# EAGLE board payload-board (EAGLE 9.6.2)
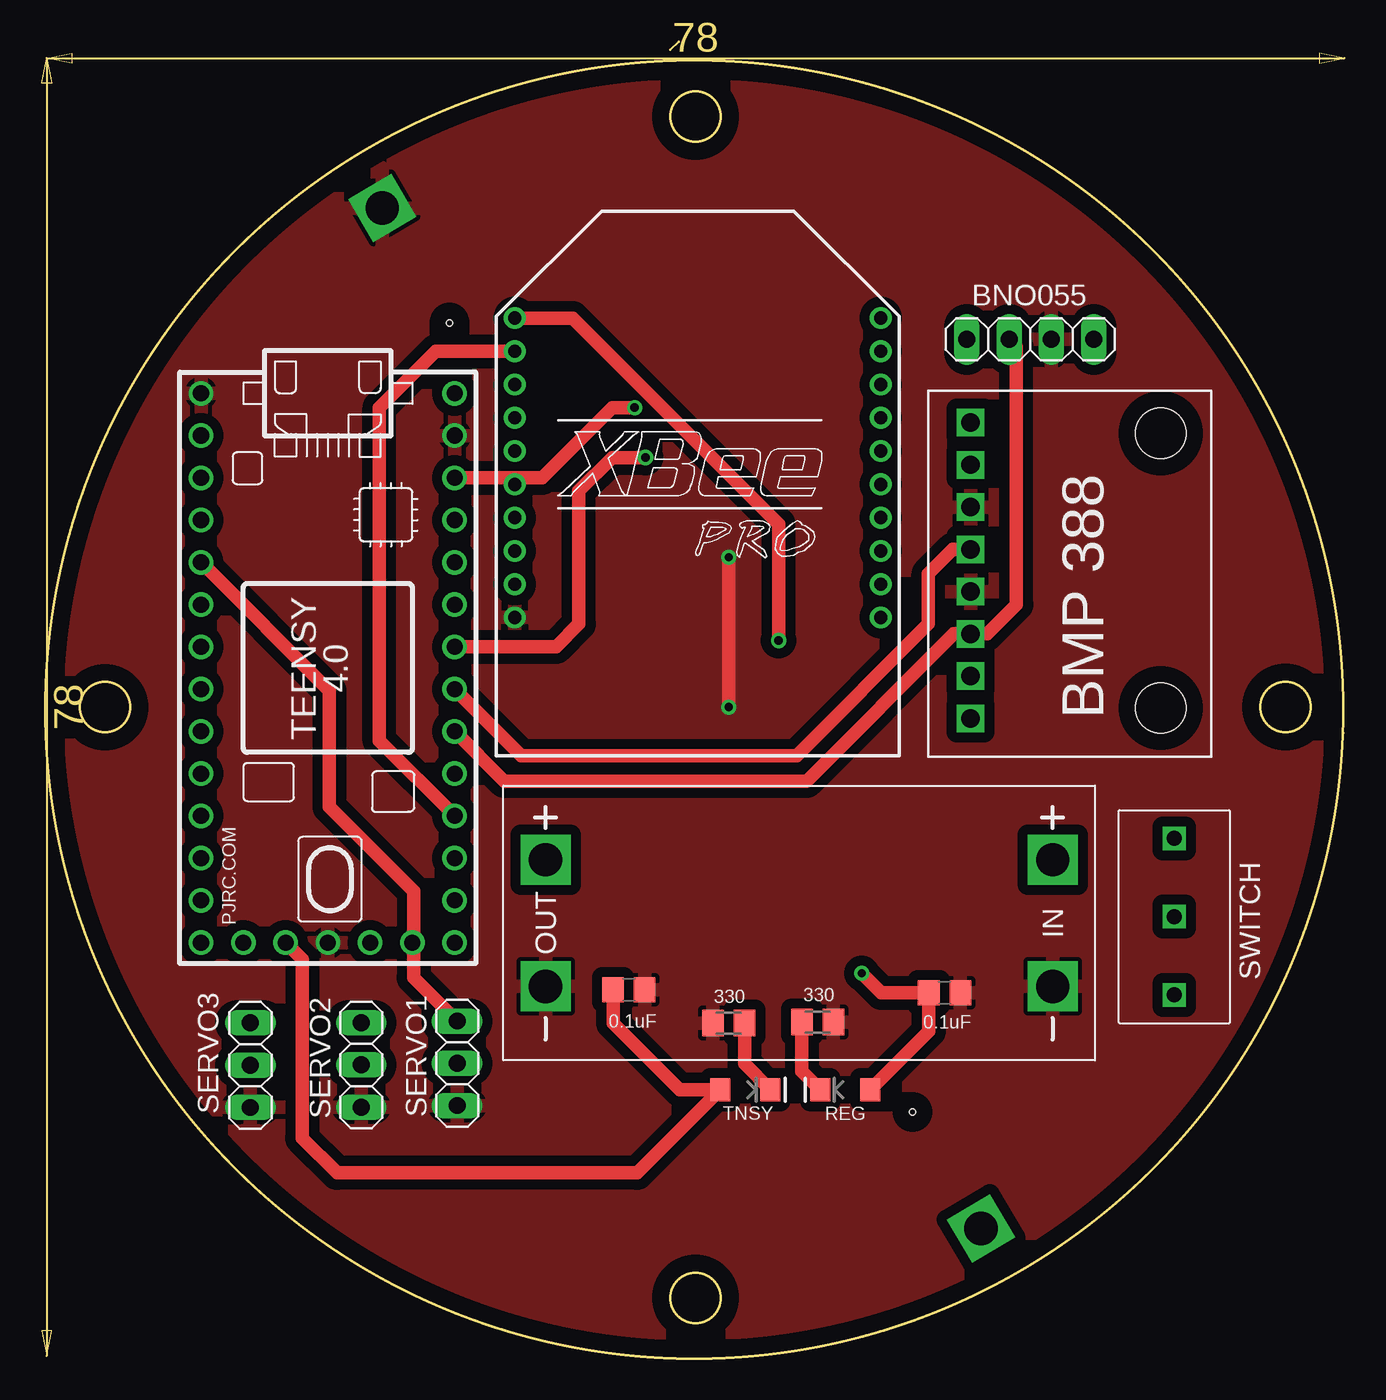
[diagram p0: board, top side]
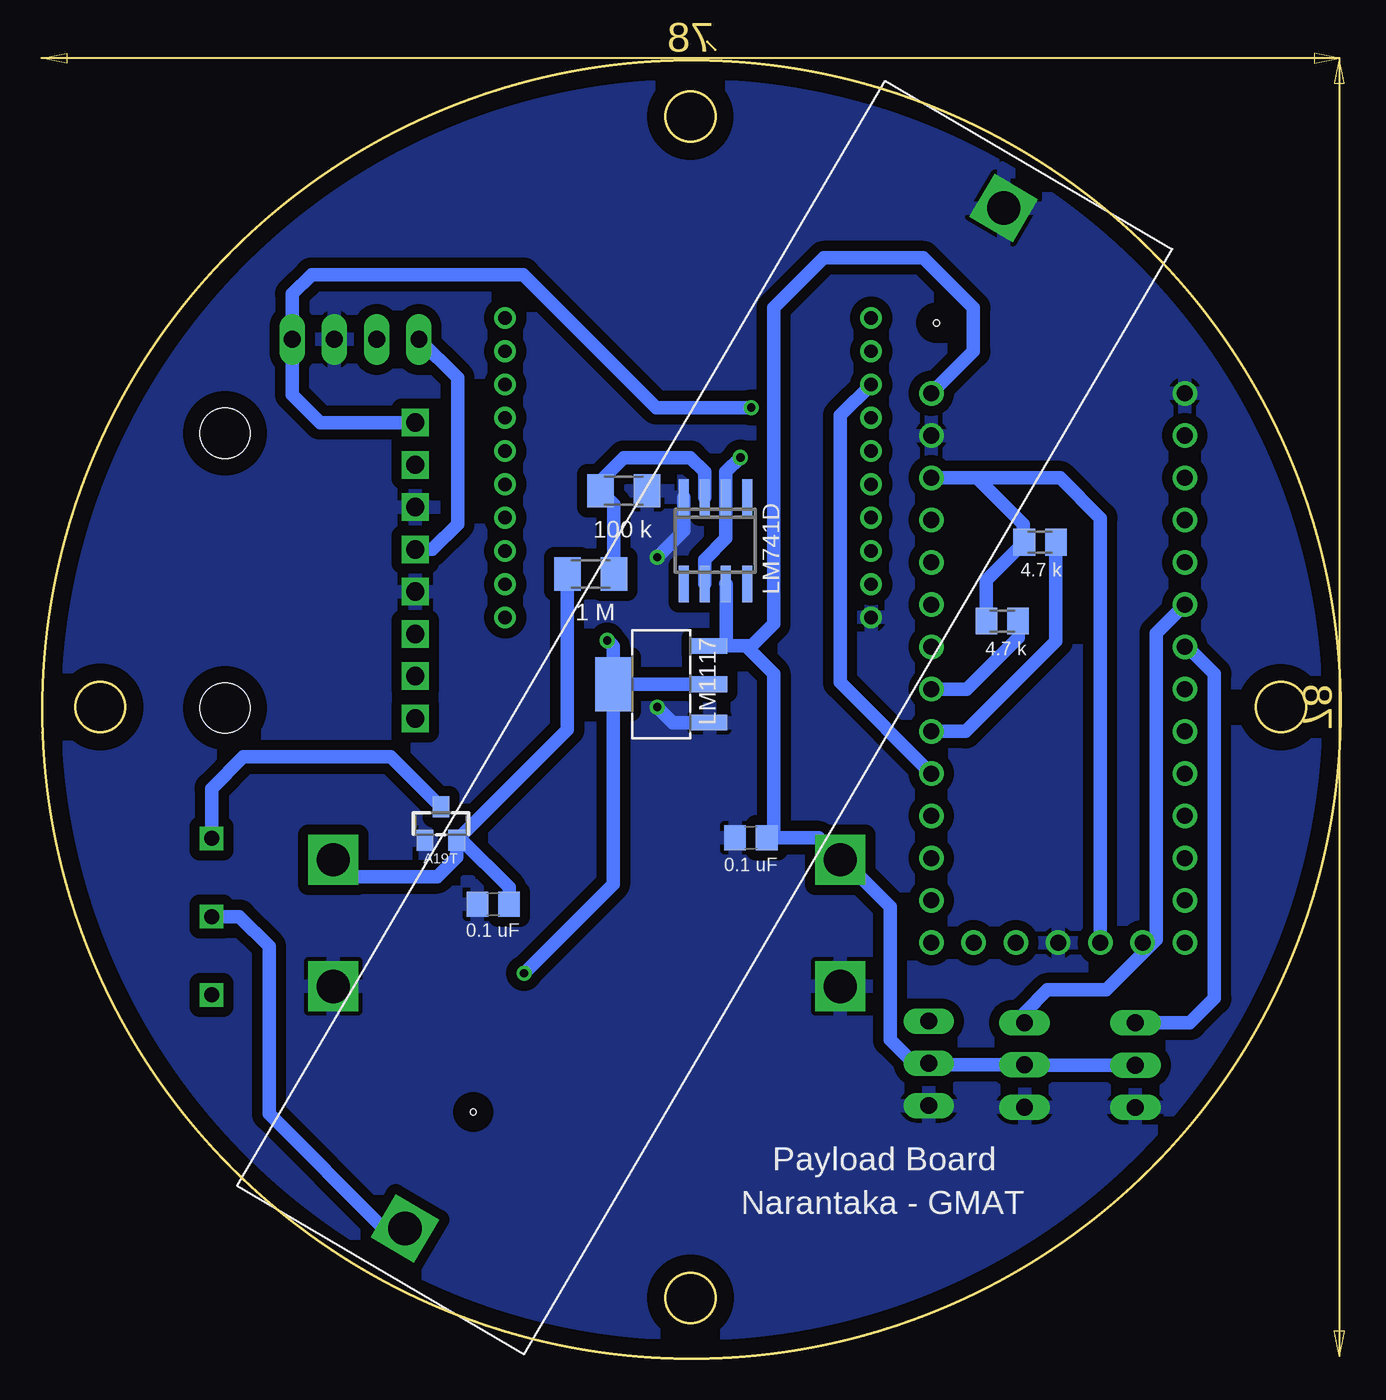
[diagram p1: board, bottom side, seen from below]

Size 78.02 x 79.15 mm. Coordinates in mm from the lower left corner, seen from the top.
Outline: 78,37.57 78.02,37.6
Outline: 37.57,78.65 38.07,79.15
Outline: circle at 39,39 radius 39
Outline: circle at 39.07,74.64 radius 1.5
Outline: circle at 39.07,3.64 radius 1.5
Outline: circle at 74.54,39.15 radius 1.5
Outline: circle at 3.58,39.14 radius 1.5
Copper layers (1*16): Top 0.035mm / dielectric 1.5mm / Bottom 0.035mm
Design rules "default *": minimum track width 6mil, minimum drill 0.35mm, track to track 6mil, track to pad 0.3mm, pad to pad 0.5mm, via to via 0.3mm, smd to smd 8mil, copper to edge 40mil, drill to drill 6mil, minimum pad ring 10mil, minimum via ring 8mil, stop-mask expansion 4mil, vias tented up to drill 0mil, thermal gap 10mil

## Footprints (pad centres in the part's own frame; a part is rotated, then mirrored left to right if it is on the bottom)
1X04 = drill 1.016 long: 1 -3.81,0; 2 -1.27,0; 3 1.27,0; 4 3.81,0
C0805 = smd 1.3 x 1.5: 1 -0.95,0; 2 0.95,0
SOT223 = smd 0.95 x 2.15: 1 -2.3,-2.9; 2 0,-2.9; 3 2.3,-2.9 | smd 3.25 x 2.15: 4 0,2.9
SO08 = smd 0.6 x 2.2: 1 -1.905,-2.6; 2 -0.635,-2.6; 3 0.635,-2.6; 4 1.905,-2.6; 5 1.905,2.6; 6 0.635,2.6; 7 -0.635,2.6; 8 -1.905,2.6
SOT23-WIDE = smd 1 x 1.27: 1 -0.95,-1; 2 0.95,-1; 3 0,1
LED-1206 = smd 1.2 x 1.4: A -1.5,0; C 1.5,0
M0805 = smd 1.3 x 1.6: 1 -0.95,0; 2 0.95,0
M1206 = smd 1.6 x 2: 1 -1.4,0; 2 1.4,0
1X03 = drill 1.016 long: 1 -2.54,0; 2 0,0; 3 2.54,0
SS12D0X = drill 0.9 square: 1 -4.7,0; 2 0,0; 3 4.7,0
DC-DC-STEP-UP-MT3608 = drill 2 pad 2.8 square: IN+ 15.24,3.81; IN- 15.24,-3.81; OUT+ -15.24,3.81; OUT- -15.24,-3.81
BMP388 = drill 1.1 square: 3VO 4.44,2.54; CS 17.14,2.54; GND 6.98,2.54; INT 19.68,2.54; SCK 9.52,2.54; SDI 14.6,2.54; SDO 12.06,2.54; VIN 1.9,2.54 | hole 3: 2.54,13.97; 19.05,13.97
18650 = drill 2 square: NEG 0,0; POS 0,71.12 | hole 0.35: 0,8; 0,63
TEENSY_4.0 = drill 0.965: 0/RX -13.97,-7.62; 1/TX -11.43,-7.62; 2 -8.89,-7.62; 3/CANTX -6.35,-7.62; 3V3_LN 16.51,-2.54; 3V3_LO -11.43,7.62; 4/CANRX -3.81,-7.62; 5 -1.27,-7.62; 6 1.27,-7.62; 7 3.81,-7.62; 8 6.35,-7.62; 9/CS 8.89,-7.62; 10/CS 11.43,-7.62; 11/MOSI 13.97,-7.62; 12/MISO 16.51,-7.62; 13/SCK 16.51,7.62; 14/A0 13.97,7.62; 15/A1 11.43,7.62; 16/A2 8.89,7.62; 17/A3 6.35,7.62; 18/A4/SDA 3.81,7.62; 19/A5/SCL 1.27,7.62; 20/A6 -1.27,7.62; 21/A7 -3.81,7.62; 22/A8 -6.35,7.62; 23/A9 -8.89,7.62; GND -16.51,-7.62; GND2 -13.97,7.62; GND3 16.51,0; ON/OFF 16.51,5.08; PROG 16.51,2.54; VBAT\ 16.51,-5.08; VIN -16.51,7.62
XBEE-PRO = drill 0.8 pad 1.27: 1 -11,9; 2 -11,7; 3 -11,5; 4 -11,3; 5 -11,1; 6 -11,-1; 7 -11,-3; 8 -11,-5; 9 -11,-7; 10 -11,-9; 11 11,-9; 12 11,-7; 13 11,-5; 14 11,-3; 15 11,-1; 16 11,1; 17 11,3; 18 11,5; 19 11,7; 20 11,9

## Placement (x,y rotation side)
BNO055  [1X04]  59.2,61.25 180 top
C1  0.1uF  [C0805]  35.07,22.15 0 top
C4  0.1uF  [C0805]  50.92,27.31 180 bottom
C5  0.1uF  [C0805]  35.43,31.29 180 bottom
C6  0.1uF  [C0805]  54.05,21.98 0 top
IC1  LM1117MP-1.8  [SOT223]  40.82,40.52 90 bottom
IC2  LM741D  [SO08]  37.57,49.15 180 bottom
IRLML6401  [SOT23-WIDE]  54.07,32.15 0 bottom
L_GRN  [LED-1206]  42.07,16.15 0 top
L_GRN1  [LED-1206]  48.07,16.15 180 top
R1  330  [M0805]  46.42,20.21 0 top
R2  4.7k  [M0805]  20.33,44.32 180 bottom
R3  1M  [M1206]  45.07,47.15 180 bottom
R4  4.7k  [M0805]  18.05,49.06 180 bottom
R5  100K  [M1206]  43.07,52.15 180 bottom
R6  330  [M0805]  41.07,20.15 0 top
SERVO1  [1X03]  24.75,17.74 90 top
SERVO2  [1X03]  18.99,17.64 90 top
SERVO3  [1X03]  12.32,17.62 90 top
SWITCH  SS120DX  [SS12D0X]  67.85,26.55 90 top
U$1  DC-DC-STEP-UP-MT3608  [DC-DC-STEP-UP-MT3608]  45.3,26.17 0 top
U$3  BMP388  [BMP388]  53.07,58.15 270 top
U$4  18650  [18650]  20.24,69.15 149.6 bottom
U$6  TEENSY_4.0  [TEENSY_4.0]  16.97,41.5 270 top
XB1  XBEE-PRO  [XBEE-PRO]  39.21,53.54 0 top

## Library data of the parts
BNO055 SERVO1-SERVO3 = pinhead
C1 C4-C6 = rcl; SPICEPREFIX: C
IC1 = lm1117_10; MF: Texas Instruments; MPN: LM1117MP-1.8; OC_FARNELL: 1469053; OC_NEWARK: 41K3467
IC2 = linear
IRLML6401 = microbuilder
L_GRN L_GRN1 = SparkFun-LED
R1-R6 = rcl; SPICEPREFIX: R
SWITCH U$3 U$4 = mario
U$1 = diy-modules
U$6 = TEENSY 4.0
XB1 = maxstream; MPN: XBP24-AWI-001; OC_FARNELL: 1337916; OC_NEWARK: 42M2667

## Nets
+3.3V: C6.1 IC1.2 IC1.4 L_GRN1.A XB1.1
+3V3: BNO055.1 C1.1 L_GRN.A R2.2 R4.2 U$3.VIN U$6.3V3_LN U$6.3V3_LO
+5V: C5.1 IC1.3 IC2.7 SERVO1.2 SERVO2.2 SERVO3.2 U$1.OUT+ U$6.VIN
GND: BNO055.2 C1.2 C4.2 C5.2 C6.2 IC1.1 IC2.4 IRLML6401.1 R1.2 R5.1 R6.1 SERVO1.1 SERVO2.1 SERVO3.1 U$1.IN- U$1.OUT- U$3.GND U$3.SDO U$4.NEG U$6.GND U$6.GND2 U$6.GND3 XB1.10
N$1: SWITCH.2 U$4.POS
N$2: L_GRN.C R6.2
N$3: IRLML6401.3 SWITCH.3
N$4: L_GRN1.C R1.1
RX_XBEE: U$6.16/A2 XB1.2
SCL: BNO055.4 R2.1 U$3.SCK U$6.19/A5/SCL
SDA: BNO055.3 R4.1 U$3.SDI U$6.18/A4/SDA
SERVO_1: SERVO1.3 U$6.3/CANTX
SERVO_2: SERVO2.3 U$6.4/CANRX
SERVO_3: SERVO3.3 U$6.5
TX_XBEE: U$6.17/A3 XB1.3
V_SENSE: IC2.2 IC2.6 U$6.20/A6
VB: IC2.3 R3.1 R5.2
VCC: C4.1 IRLML6401.2 R3.2 U$1.IN+

## Tracks (layer width: path | path; a pad name or v marks a point on that pad's centre or on a via)
+3.3V  (via drill 0.5)
  Top 0.813: L_GRN1.A 53.1,19.68 C6.1 50.24,21.98 v49.07,23.15 | v44.07,43.15 44.07,50.15 31.68,62.53 XB1.1
  Bottom 0.813: IC1.4 43.72,28.5 v49.07,23.15 | IC1.4 43.72,42.8 v44.07,43.15 | IC1.2 IC1.4
+3V3  (via drill 0.5)
  Top 0.813: C1.1 34.12,20.15 38.12,16.15 L_GRN.A 35.57,11.15 17.53,11.15 15.43,13.24 15.43,23.99 U$6.3V3_LN | U$6.3V3_LO 29.85,52.93 34.07,57.15 v35.41,57.15
  Bottom 0.813: R2.2 21.27,46.79 R4.2 19.07,49.12 19.07,50.15 21.85,52.93 | 21.85,52.93 U$6.3V3_LO | U$6.3V3_LN 14.43,50.51 16.85,52.93 21.85,52.93 | v35.41,57.15 41.11,57.15 49.11,65.15 61.84,65.15 63.01,63.98 BNO055.1 63.01,57.94 61.32,56.25 U$3.VIN
+5V
  Bottom 0.813: 34.07,31.29 31.37,31.29 U$1.OUT+ 29.9,29.98 27.07,27.15 27.07,19.15 25.66,17.74 SERVO1.2 24.65,17.64 SERVO2.2 18.97,17.62 SERVO3.2 | 34.07,31.29 C5.1 | 36.92,42.82 IC1.3 35.4,42.82 34.07,44.15 34.07,63.15 31.07,66.15 25.07,66.15 22.07,63.15 22.07,60.53 U$6.VIN | 36.92,42.82 35.74,42.82 34.07,41.15 34.07,31.29 | IC2.7 36.92,46.54 36.92,42.82
GND  (via drill 0.5)
  Top 0.813: v41.07,39.15 v41.07,48.15
  Bottom 0.813: IC1.1 40.14,38.22 v41.07,39.15 | v41.07,48.15 39.48,49.74 IC2.4
  pour Top (isolate 0.61): -0.18,78.23 78.07,78.23 78.07,-0.57 -0.18,-0.57
  pour Bottom (isolate 0.61): -0.19,79.11 78.07,79.11 78.07,-0.76 -0.19,-0.76
N$1
  Bottom 0.813: U$4.POS 57.5,7.8 64.4,14.7 64.4,24.77 66.18,26.55 SWITCH.2
N$2
  Top 0.813: L_GRN.C 42.02,17.7 R6.2
N$3
  Bottom 0.813: IRLML6401.3 57.07,36.15 65.95,36.15 67.85,34.25 SWITCH.3
N$4
  Top 0.813: L_GRN1.C 45.47,17.25 R1.1
RX_XBEE
  Top 0.813: U$6.16/A2 20.07,37.13 20.07,57.15 23.46,60.53 XB1.2
SCL
  Top 0.813: U$6.19/A5/SCL 28.59,36.23 45.15,36.23 53.07,44.15 53.07,47.15 54.55,48.63 U$3.SCK
  Bottom 0.813: R2.1 19.38,43.32 22.46,40.23 U$6.19/A5/SCL | U$3.SCK 54.59,48.63 53.07,50.15 53.07,58.93 BNO055.4
SDA
  Top 0.813: U$6.18/A4/SDA 27.59,34.69 45.75,34.69 54.61,43.55 U$3.SDI 56.61,43.55 58.36,45.3 58.36,60.82 BNO055.3
  Bottom 0.813: R4.1 17.11,43.12 22.53,37.69 U$6.18/A4/SDA
SERVO_1
  Top 0.813: U$6.3/CANTX 17.07,40.13 17.07,33.15 22.14,28.08 22.14,22.89 SERVO1.3
SERVO_2
  Bottom 0.813: SERVO2.3 18.99,20.78 17.62,22.15 14.07,22.15 11.07,25.15 11.07,43.59 U$6.4/CANRX
SERVO_3
  Bottom 0.813: SERVO3.3 9.06,20.16 7.58,21.64 7.58,41.15 9.2,42.77 U$6.5
TX_XBEE
  Bottom 0.813: U$6.17/A3 30.07,40.63 30.07,56.68 XB1.3
V_SENSE  (via drill 0.5)
  Top 0.813: U$6.20/A6 30.69,42.77 32.07,44.15 32.07,52.15 34.07,54.15 v36.07,54.15
  Bottom 0.813: IC2.6 38.2,48.02 36.94,49.28 IC2.2 36.94,53.28 v36.07,54.15
VB
  Bottom 0.813: R3.1 43.67,51.35 R5.2 44.47,52.75 43.07,54.15 39.07,54.15 38.2,53.28 IC2.3
VCC
  Bottom 0.813: IRLML6401.2 46.47,37.8 R3.2 | C4.1 49.97,28.31 52.81,31.15 IRLML6401.2 | IRLML6401.2 53.12,30.12 54.29,28.96 59.52,28.96 U$1.IN+

## Text on the board
tNames: 330 | 330 | 0.1uF | 0.1uF | TNSY | REG
bNames: LM741D | 100 k | 4.7 k | 1 M | 4.7 k | LM1117 | A19T | 0.1 uF | 0.1 uF | Payload Board | Narantaka - GMAT